# Altium PCB bbb.PcbDoc
Units mil, origin at the board's own origin, x right, y up, seen from the top; angles counter-clockwise.
Board outline 1950 x 1950 mil, 2 copper layers (Top Layer, Bottom Layer); 50 components, 40 nets, 176 pads, 13 vias.
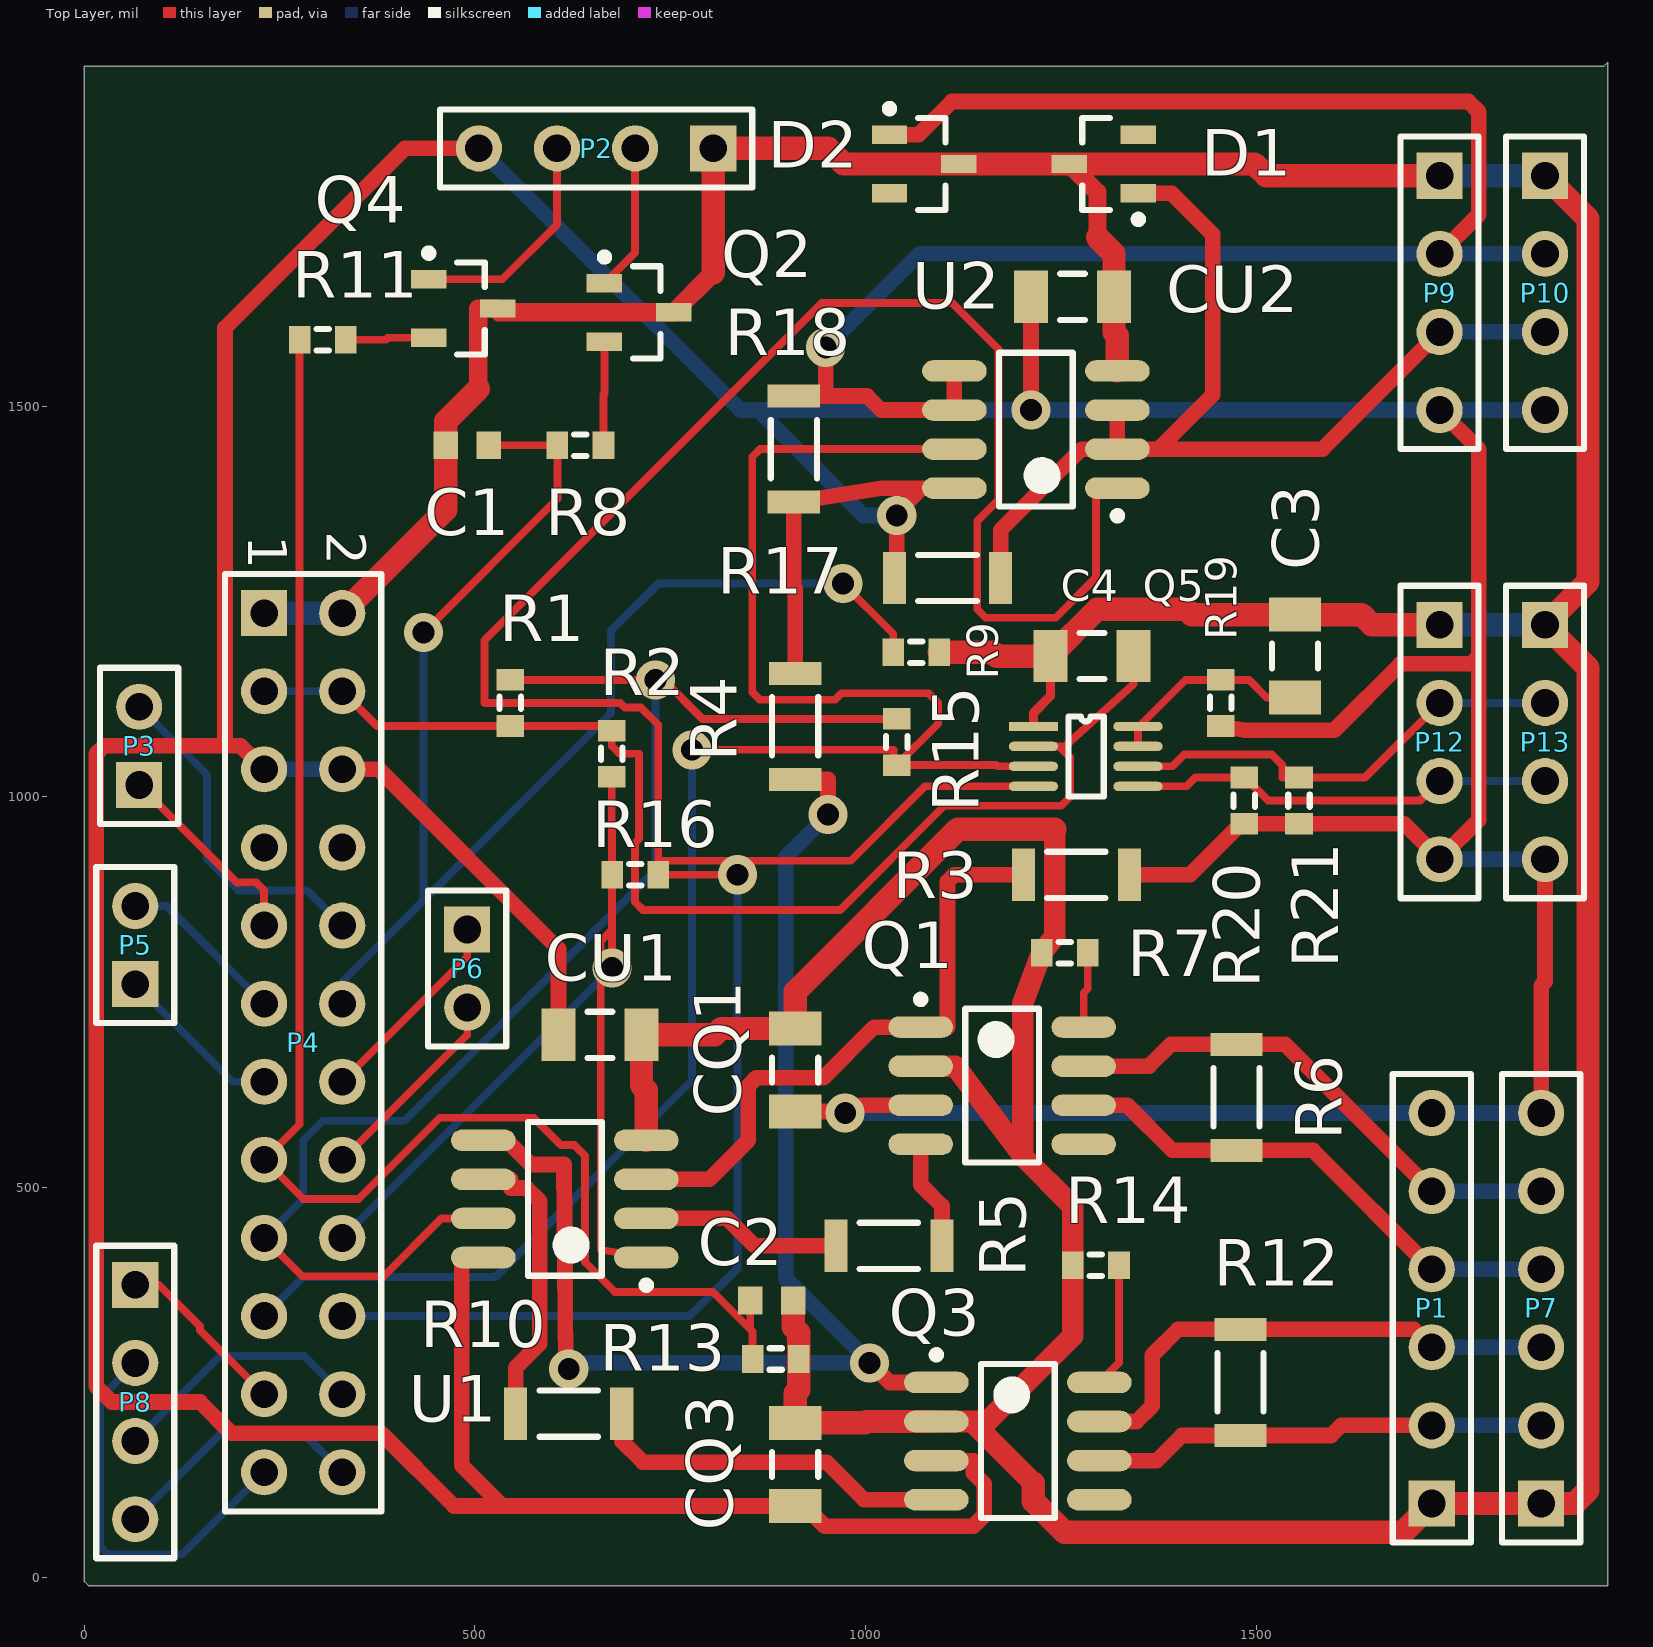
[diagram p0: Top Layer view]
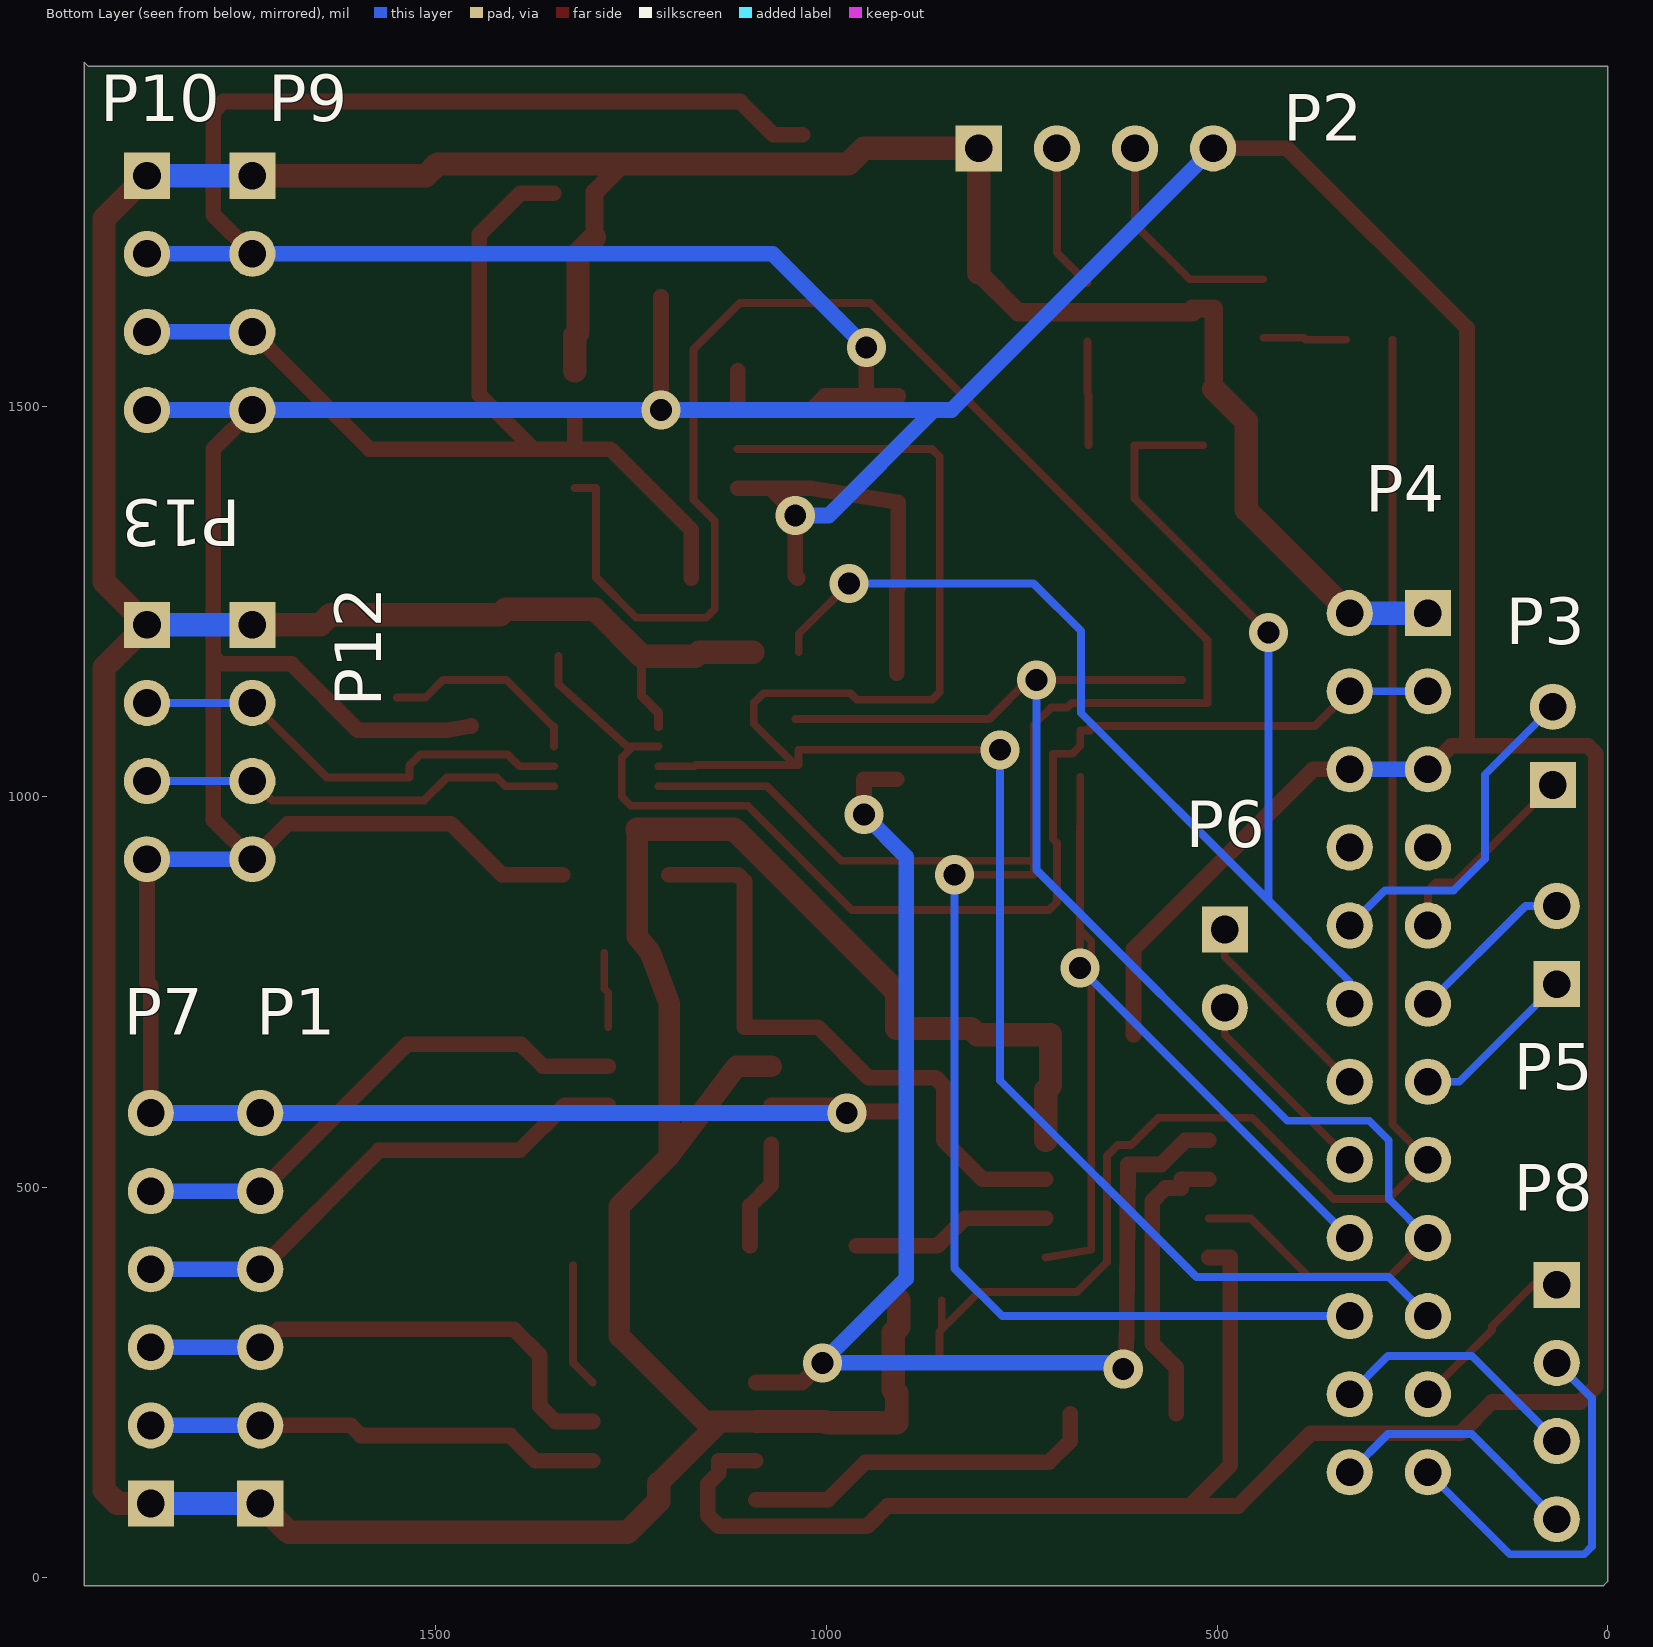
[diagram p1: Bottom Layer view, seen from below]

## Layer stack, top to bottom
Top Solder: solder mask 0.4, Solder Resist, Dk 3.5
Top Layer: signal copper 1.4
Dielectric 1: dielectric 12.6, FR-4, Dk 4.8
Bottom Layer: signal copper 1.4
Bottom Solder: solder mask 0.4, Solder Resist, Dk 3.5

## Board outline
5,-10 0,-5 0,1935 1945,1935 1950,1940 1950,-10

## Design rules (kind name [scope] priority, off if disabled: settings)
Clearance [All] p1: gap=10
MinimumSolderMaskSliver MinimumSolderMaskSliver_1 [HasFootprint('DCT')] p1: minsoldermaskwidth=5
MinimumSolderMaskSliver [All] p2: minsoldermaskwidth=10
PolygonConnect [All] p1: connectstyle=Relief reliefconductorwidth=10 reliefentries=4 polygonreliefangle="90 Angle" airgapwidth=10
RoutingVias [All] p1: holewidth=28 width=50 viastyle="Through Hole" minholewidth=28 minwidth=50 maxholewidth=28 maxwidth=50
SilkToSolderMaskClearance SilkToSolderMaskClearance_2 [IsPad vs HasFootprint('J1-0603')] p1: minsilkscreentomaskgap=2 clearancetoexposedcopper=TRUE
SilkToSolderMaskClearance SilkToSolderMaskClearance_1 [IsPad vs HasFootprint('DCT')] p2: minsilkscreentomaskgap=5 clearancetoexposedcopper=TRUE
SilkToSolderMaskClearance [IsPad] p3: minsilkscreentomaskgap=10 clearancetoexposedcopper=TRUE
SolderMaskExpansion [All] p1: expansion=4
Width Width_3 [InNet('GND')] p1: maxlimit=50 minlimit=10 preferedwidth=30 minimp=50.000000 maximp=50.000000 favimp=50.000000
Width Width_2 [InNet('5V')] p2: maxlimit=30 minlimit=10 preferedwidth=20 minimp=50.000000 maximp=50.000000 favimp=50.000000
Width Width_1 [InNetClass('hc')] p3: maxlimit=30 minlimit=10 preferedwidth=20 minimp=50.000000 maximp=50.000000 favimp=50.000000
Width [All] p4: maxlimit=10 minlimit=10 preferedwidth=10
28 further rules are at their usual default settings.

## Classes and differential pairs
net class hc: 5V NetD1_1 NetD2_1 NetP1_2 NetP1_3 NetP1_4 NetP1_5 NetQ1_1 NetQ1_4 NetQ3_1 NetQ3_4 NetR5_2 NetR10_2

## Components (designator, comment, footprint, x,y, rotation, side; value= is the part's Value field where it differs from the comment)
C1 "Cap Semi" 1608[0603] 490,1450 r180 top
C2 "Cap Semi" 1608[0603] 880,355 r0 top
C3 "Cap Semi" C1206 1550,1180 r90 top
C4 "Cap Semi" C1206 1290,1180 r0 top
CQ1 "Cap Semi" C1206 910,650 r270 top
CQ3 "Cap Semi" C1206 910,145 r270 top
CU1 "Cap Semi" C1206 660,695 r180 top
CU2 "Cap Semi" C1206 1265,1640 r180 top
D1 "BAT54A" SOT-23_N 1305,1810 r180 top
D2 "BAT54A" SOT-23_N 1075,1810 r0 top
P1 "Header 6" HDR1X6 1725,95 r90 top
P2 "Header 4" HDR1X4 805,1830 r180 top
P3 "Header 2" HDR1X2 70,1015 r90 top
P4 "Header 12X2" HDR2X12 230,1235 r270 top
P5 "Header 2" HDR1X2 65,760 r90 top
P6 "Header 2" HDR1X2 490,830 r270 top
P7 "Header 6" HDR1X6 1865,95 r90 top
P8 "Header 4" HDR1X4 65,375 r270 top
P9 "Header 4" HDR1X4 1735,1795 r270 top
P10 "Header 4" HDR1X4 1870,1795 r270 top
P12 "Header 4" HDR1X4 1735,1220 r270 top
P13 "Header 4" HDR1X4 1870,1220 r270 top
Q1 "PCA82C251" SOIC150-8_M 1175,630 r0 top
Q2 "QNPN" SOT-23B_N 710,1620 r0 top
Q3 "PCA82C251" SOIC150-8_M 1195,175 r0 top
Q4 "QNPN" SOT-23B_N 485,1625 r0 top
Q5 "PCA9306DCTR" DCT 1215,1090 r0 top
R1 "Res3" J1-0603 545,1120 r270 top
R2 "Res3" J1-0603 675,1055 r90 top
R3 "270" R1206 1270,900 r0 top
R4 "270" R1206 910,1090 r90 top
R5 "60" R1206 1030,425 r180 top
R6 "120" R1206 1475,615 r90 top
R7 "Res3" J1-0603 1255,800 r180 top
R8 "Res3" J1-0603 635,1450 r0 top
R9 "Res3" J1-0603 1065,1185 r180 top
R10 "60" R1206 620,210 r180 top
R11 "Res3" J1-0603 305,1585 r0 top
R12 "120" R1206 1480,250 r90 top
R13 "Res3" J1-0603 885,280 r180 top
R14 "Res3" J1-0603 1295,400 r180 top
R15 "Res3" J1-0603 1040,1070 r270 top
R16 "Res3" J1-0603 705,900 r0 top
R17 "330" R1206 1105,1280 r180 top
R18 "330" R1206 908.15,1445 r270 top
R19 "Res3" J1-0603 1455,1120 r90 top
R20 "Res3" J1-0603 1485,995 r270 top
R21 "Res3" J1-0603 1555,995 r270 top
U1 "PCA9600D" SOIC150-8_M 615,485 r180 top
U2 "PCA9600D" SOIC150-8_M 1218.15,1470 r180 top

## Footprints (in the part's own frame and the unit in brackets; to place one, negate y for a bottom-side part, rotate by r counter-clockwise, add the part's x,y. Pads: shape width x height; smd on the part's side, far side on the other; paste and mask are expansions set on the pad)
1608[0603] [mm] "Chip Capacitor, Body 1.6x0.8mm, IPC High Density"
  rect 0.8x0.9 smd: 1(-0.7,0) 2(0.7,0)
  body extent -0.87,-0.48 0.87,0.48, height 1.3
C1206 [mm] "Chip Capacitor, Body 3.2x1.6mm, IPC High Density"
  rect 1.1x1.7 smd: 1(-1.35,0) 2(1.35,0)
  silkscreen extent -0.4,-0.75 0.4,0.75, body extent -1.7,-0.9 1.7,0.9, height 1.3
DCT [mm]
  rect 1.6x0.3 smd: 1(0,0)
  oval 1.6x0.3 smd: 2(0,-0.65) 3(0,-1.3) 4(0,-1.95) 5(3.4,-1.95) 6(3.4,-1.3) 7(3.4,-0.65) 8(3.4,0)
  silkscreen extent 1.14,-2.28 2.29,0.33
HDR1X2 [mm] "Connector; Header; 2 Position"
  rect 1.5x1.5 hole 0.9: 1(0,0)
  round 1.5 hole 0.9: 2(2.54,0)
  silkscreen extent -1.27,-1.27 3.81,1.27
HDR1X4 [mm] "Connector; Header; 4 Position"
  rect 1.5x1.5 hole 0.9: 1(0,0)
  round 1.5 hole 0.9: 2(2.54,0) 3(5.08,0) 4(7.62,0)
  silkscreen extent -1.27,-1.27 8.89,1.27
HDR1X6 [mm] "Connector; Header; 6 Position"
  rect 1.5x1.5 hole 0.9: 1(0,0)
  round 1.5 hole 0.9: 2(2.54,0) 3(5.08,0) 4(7.62,0) 5(10.16,0) 6(12.7,0)
  silkscreen extent -1.27,-1.27 13.97,1.27
HDR2X12 [mm] "Connector; Header; 12x2 Position"
  rect 1.5x1.5 hole 0.9: 1(0,0)
  round 1.5 hole 0.9: 2(0,2.54) 3(2.54,0) 4(2.54,2.54) 5(5.08,0) 6(5.08,2.54) 7(7.62,0) 8(7.62,2.54) 9(10.16,0) 10(10.16,2.54) 11(12.7,0) 12(12.7,2.54) 13(15.24,0) 14(15.24,2.54) 15(17.78,0) 16(17.78,2.54) 17(20.32,0) 18(20.32,2.54) 19(22.86,0) 20(22.86,2.54) 21(25.4,0) 22(25.4,2.54) 23(27.94,0) 24(27.94,2.54)
  silkscreen extent -1.27,-1.27 29.21,3.81
J1-0603 [mm] "Chip Resistor, Body 1.6x0.8mm, IPC High Density"
  rect 0.7x0.9 smd: 1(-0.75,0) 2(0.75,0)
  silkscreen extent -0.2,-0.35 0.2,0.35, body extent -0.85,-0.48 0.85,0.48, height 0.9
R1206 [mm] "Chip Resistor, 2-Leads, Body 3.20x1.60mm, IPC Medium Density"
  rect 0.75x1.7 smd: 1(-1.725,0) 2(1.725,0)
  silkscreen extent -0.95,-0.75 0.95,0.75, body extent -1.6,-0.8 1.6,0.8, height 0.6
SOIC150-8_M [mm] "8-Pin Plastic Narrow Body Small Outline Integrated Circuit 1.27 mm Pitch, IPC Low Density"
  oval 2.1x0.7 smd: 1(-2.65,1.905) 2(-2.65,0.635) 3(-2.65,-0.635) 4(-2.65,-1.905) 5(2.65,-1.905) 6(2.65,-0.635) 7(2.65,0.635) 8(2.65,1.905)
  silkscreen extent -2.77,-2.5 1.2,2.93, body extent -2,-2.5 2,2.5, height 1.76
SOT-23_N [mm] "SOT23, 3-Leads, Body 2.9x1.3mm, Pitch 0.95mm, Lead Span 2.5mm, IPC Medium Density"
  rect 1.15x0.6 smd: 1(-1.125,0.95) 2(-1.125,-0.95) 3(1.125,0)
  silkscreen extent -1.25,-1.5 0.7,1.92, body extent -0.7,-1.5 0.7,1.5, height 1.1
SOT-23B_N [mm] "SOT23, 3-Leads, Body 2.9x1.3mm, Pitch 0.95mm, Lead Span 2.4mm, IPC Medium Density"
  rect 1.15x0.6 smd: 1(-1.125,0.95) 2(-1.125,-0.95) 3(1.125,0)
  silkscreen extent -1.25,-1.5 0.7,1.92, body extent -0.7,-1.5 0.7,1.5, height 1.14

## Part data
C1 C2 C3 C4 CQ1 CQ3 CU1 CU2: "Capacitor (Semiconductor SIM Model)"
D1 D2: library part Diode, "Default Diode"
P1 P7: "Header, 6-Pin"
P2 P8 P9 P10 P12 P13: "Header, 4-Pin"
P3 P5 P6: "Header, 2-Pin"
P4: "Header, 12-Pin, Dual row"
Q2 Q4: "NPN Bipolar Transistor"
Q5: library part PCA9306, "PCA9306"
R1 R2 R7 R8 R9 R11 R13 R14 R15 R16 R19 R20 R21: "Resistor"
R3 R4 R5 R6 R10 R12 R17 R18: library part Res3, "Resistor"
U1 U2: library part P82B96

## Via types
v1: diameter 50, hole 28, Top Layer to Bottom Layer, 13 vias

## Nets (pads, with @x,y where several pads share a name; then routed paths per layer and width w, separated by ;. In a path a pad name is that pad's centre, name@x,y a point inside that pad or via, vN(x,y) a via of type N, cw(c..) or ccw(c..) an arc to the next point about the centre after c; other vN are vias at no path point)
3_3V: C4.2 P4.3 P4.4 Q5.2 R1.2 R2.2 | length 1606.3
  Top Layer w10: P4.4 374.53,1090.47 R1.2 662.28,1090.47 662.28,1084.53 R2.2 675,1065 685,1055 710,1055 710,946 705,941 705,865 715,855 967.5,855 1100.97,988.47 1250.47,988.47 1262,1000 1262,1050 1247.59,1064.41 ; Q5.2 1254.87,1064.41 1343.15,1144.41 C4.2
  Bottom Layer w10: P4.3 P4.4
5V: CQ1.2 CQ3.2 CU1.2 CU2.2 P1.6 P2.4 P4.5 P4.6 P7.6 P9.4 P10.4 P12.4 P13.4 Q1.3 Q3.3 R3.2 R4.2 R17.2 R18.2 R19.1 R20.2 R21.2 U1.8 U2.8 | length 9685.6
  Top Layer w20: P4.5 200,1065 180,1065 ; P4.6 376.85,1035 606.85,805 CU1.2 ; P2.4 410,1830 180,1600 180,1065 ; U1.8 483,410 483,143.85 535,91.85 ; CQ1.2 v1@972.15,596.85 ; R4.2 910,1266 908.15,1267.85 R18.2 1019.91,1395 1072.09,1395 ; v1(974,595) v1@972.15,596.85 ; R17.2 1040,1282.91 v1(1040,1360) 1040,1357.09 1037.09,1360 1072.09,1395 ; Q1.3 994.15,605 986,596.85 v1@972.15,596.85 ; Q3.3 1138.01,150 1138.01,134 1152.01,120 1152.01,80 1138.01,66 947.85,66 922,91.85 CQ3.2 535,91.85 ; U2.8 1072.09,1395 ; v1(1211.85,1495) CU2.2 ; R3.2 1415.53,900 1481,965.47 R20.2 R21.2 1689.53,965.47 P12.4 1785,970 1785,1180 ; R19.1 1485.47,1085 1600,1085 1685,1170 1775,1170 1785,1180 ; P9.4 1785,1445 1785,1180 ; P7.6 1865,758 1870,763 P13.4 ; 180,1065 25,1065 15,1055 15,245 35,225 148,225 188,185 380,185 473.15,91.85 535,91.85
  Bottom Layer w20: P4.5 P4.6 ; P2.4 840,1495 865,1495 ; v1(974,595) P1.6 P7.6 ; v1(1040,1360) 997.17,1360 862.17,1495 v1(1211.85,1495) P9.4 P10.4 ; P12.4 P13.4
GND: C1.2 C2.2 C3.2 C4.1 CQ1.1 CQ3.1 CU1.1 CU2.1 D1.3 D2.3 P1.1 P2.1 P4.1 P4.2 P7.1 P9.1 P10.1 P12.1 P13.1 Q1.2 Q2.3 Q3.2 Q4.3 Q5.1 R7.2 R9.1 R13.1 R14.2 U1.4 U2.4 | length 8342.9
  Top Layer w11.81: Q5.1 1215,1107.15 1236.85,1129 C4.1
  Top Layer w23.62: 504,1522 504,1625 Q4.3 531,1625 531,1620 Q2.3 805,1670.71 ; D1.3 1297,1773.71 1297,1716
  Top Layer w27.56: Q1.2 1115,655 1201,540.47 ; Q3.2 1136,200 ; 1215,121 1136,200 ; 1242,958.47 1242,820.47 R7.2 1201,734.53 1201,540.47 ; 1136,200 1156,200 1265.47,309.47 R14.2 1265.47,475.53 1201,540 1201,540.47
  Top Layer w30: P4.2 462.44,1367.44 C1.2 462.44,1480.44 504,1522 ; U1.4 719.33,624 713.15,630.18 CU1.1 807,695 815.15,703.15 CQ1.1 910,750 1118.47,958.47 1242,958.47 ; 805,1670.71 P2.1 952,1830 972,1810 D2.3 D1.3 1498,1810 1513,1795 P9.1 ; C2.2 907.56,320.97 914.53,314 R13.1 914.53,240.53 910,236 CQ3.1 999,198.15 1000.85,200 Q3.2 ; R9.1 1163,1185 1168,1180 C4.1 1296.85,1240 1410.85,1240 1417.7,1233.15 C3.2 1635,1233.15 1648.15,1220 P12.1 ; 1215,121 1215,98 1255,58 1688,58 P1.1 P7.1 1908,95 1925,112 1925,1165 P13.1 1925,1275 1925,1740 P10.1 ; 1297,1716 1318.15,1694.85 CU2.1 1318.15,1594.33 1322.48,1590 U2.4
  Bottom Layer w30: P4.1 P4.2 ; P1.1 P7.1 ; P12.1 P13.1 ; P9.1 P10.1
NetC1_1: C1.1 P4.12 R8.1 R9.2 | length 1798.4
  Top Layer w10: v1(434,1210.06) 605.47,1381.53 R8.1 C1.1 ; v1(971,1273) 1035.47,1208.53 R9.2
  Bottom Layer w10: P4.12 330,763 434,867 ; v1(434,1210.06) 434,867 ; v1(971,1273) 735,1273 674,1212 674,1107 434,867
NetC2_1: C2.1 P4.15 R11.1 R13.2 | length 2023.2
  Top Layer w10: R11.1 275.47,580.47 P4.15 280,485 351,485 455,589 575,589 610,554 627,554 641,540 641,404 679,366 804.47,366 852.44,318.03 ; C2.1 852.44,318.03 ; R13.2 855.47,315 852.44,318.03
NetC3_1: C3.1 Q5.7 Q5.8 R19.2 | length 260.8
  Top Layer w10: Q5.7 Q5.8 1350.47,1090 1410,1149.53 R19.2 1491,1149.53 1513.68,1126.85 C3.1
NetD1_1: D1.1 P9.3 P10.3 R17.1 U2.2 U2.3 | length 1334.1
  Top Layer w20: R17.1 1172.91,1341.22 1276.7,1445 U2.2 ; U2.3 U2.2 ; D1.1 1391.8,1772.6 1444.4,1720 1444.4,1514.4 1375,1445 ; P9.3 1585,1445 1375,1445 ; U2.2 1375,1445
  Bottom Layer w20: P9.3 P10.3
NetD2_1: D2.1 P9.2 P10.2 R18.1 U2.5 U2.6 | length 2275.9
  Top Layer w20: R18.1 949,1512.91 ; v1(949,1575) 949,1512.91 ; D2.1 1068,1847.4 1110.6,1890 1772,1890 1785,1877 1785,1745 P9.2 ; U2.5 U2.6 1019.91,1495 1002,1512.91 949,1512.91
  Bottom Layer w20: v1(949,1575) 1069,1695 P9.2 P10.2
NetP1_2: P1.2 P7.2 Q3.6 R12.1 | length 584.3
  Top Layer w20: Q3.6 1373,150 1405.09,182.09 R12.1 1596,182.09 1608.91,195 P1.2
  Bottom Layer w20: P1.2 P7.2
NetP1_3: P1.3 P7.3 Q3.7 R12.2 | length 662
  Top Layer w20: Q3.7 1347,200 1367,220 1367,284.91 1400,317.91 R12.2 1702.09,317.91 P1.3
  Bottom Layer w20: P1.3 P7.3
NetP1_4: P1.4 P7.4 Q1.6 R6.1 | length 672.7
  Top Layer w20: Q1.6 1335.09,605 1393,547.09 R6.1 1572.91,547.09 P1.4
  Bottom Layer w20: P1.4 P7.4
NetP1_5: P1.5 P7.5 Q1.7 R6.2 | length 675.1
  Top Layer w20: Q1.7 1363,655 1390.91,682.91 R6.2 1537.09,682.91 P1.5
  Bottom Layer w20: P1.5 P7.5
NetP2_2: P2.2 Q2.1 | length 188.9
  Top Layer w10: Q2.1 705,1696.69 P2.2
NetP2_3: P2.3 Q4.1 | length 290.9
  Top Layer w10: Q4.1 535,1662.4 605,1732.4 P2.3
NetP3_1: P3.1 P4.9 | length 260.9
  Top Layer w10: P3.1 195,890 220,890 230,880 P4.9
NetP3_2: P3.2 P4.10 | length 439.2
  Bottom Layer w10: P3.2 157,1028 157,920 197,880 285,880 P4.10
NetP4_11: P4.11 P5.2 | length 216.8
  Bottom Layer w10: P5.2 105,860 P4.11
NetP4_13: P4.13 P5.1 | length 216.8
  Bottom Layer w10: P5.1 190,635 P4.13
NetP4_14: P4.14 P6.1 | length 261.3
  Top Layer w10: P4.14 490,795 P6.1
NetP4_16: P4.16 P6.2 | length 261.3
  Top Layer w10: P4.16 490,695 P6.2
NetP4_19: P4.19 Q5.3 R15.2 U2.7 | length 2469.6
  Top Layer w10: v1(778,1060) 1036,1060 1036,1040.47 R15.2 ; U2.7 865,1445 855,1435 855,1134 865,1124 961,1124 969.28,1132.28 1080.72,1132.28 1093,1120 1093,1093.47 R15.2 ; Q5.3 1169,1038.82 1167.35,1040.47 R15.2
  Bottom Layer w10: P4.19 280,385 526.28,385 778,636.72 v1(778,1060)
NetP4_20: P4.20 Q5.4 R16.2 U2.1 | length 3688.3
  Top Layer w10: v1(836,900) R16.2 734.53,918 ; Q5.4 1076.23,1013.23 981,918 734.53,918 ; U2.1 1295,1395 1295,1280.58 1243.42,1229 1154,1229 1143,1240 1143,1352.84 1170.16,1380 1170.16,1572.84 1111,1632 944,1632 512,1200 512,1120 686,1120 692,1114 712.53,1114 734.53,1092 734.53,918
  Bottom Layer w10: P4.20 775,335 836,396 v1(836,900)
NetP4_21: P4.21 P8.1 | length 225.9
  Top Layer w10: P8.1 95,375 148,322 148,317 P4.21
NetP4_22: P4.22 P8.3 | length 330.4
  Bottom Layer w10: P8.3 174,284 281,284 P4.22
NetP4_23: P4.23 P8.2 | length 511.3
  Bottom Layer w10: P8.2 20,230 20,40 30,30 125,30 P4.23
NetP4_24: P4.24 P8.4 | length 330.4
  Bottom Layer w10: P8.4 174,184 281,184 P4.24
NetP12_2: P12.2 P13.2 Q5.6 R21.1 | length 588.2
  Top Layer w10: Q5.6 1393,1038.82 1408.18,1054 1520,1054 1534,1040 1534,1024.53 R21.1 1639.53,1024.53 P12.2
  Bottom Layer w10: P12.2 P13.2
NetP12_3: P12.3 P13.3 Q5.5 R20.1 | length 548.4
  Top Layer w10: Q5.5 1411,1013.23 1422.3,1024.53 R20.1 1485.94,1024.53 1515.47,995 1710,995 P12.3
  Bottom Layer w10: P12.3 P13.3
NetQ1_1: Q1.1 R3.1 U1.3 | length 794.6
  Top Layer w20: U1.3 800,510 850,560 850,630 860,640 946,640 1011,705 Q1.1 1105,705 1105,891.5 1113.5,900 R3.1
NetQ1_4: Q1.4 R5.1 | length 141.3
  Top Layer w20: Q1.4 1070.67,503.24 1097.91,476 R5.1
NetQ1_8: Q1.8 R7.1 | length 97.2
  Top Layer w10: Q1.8 1279.33,749 1284.53,754.2 R7.1
NetQ2_2: Q2.2 R8.2 | length 133.1
  Top Layer w10: R8.2 664.53,1515 665.71,1516.18 Q2.2
NetQ3_1: Q3.1 R4.1 U1.5 | length 1719.9
  Top Layer w20: U1.5 540.42,560 571.42,529 614,529 616,271 v1(620,267) ; R4.1 952,1022.09 v1(952,977) ; v1(1005,275) 1006,275 1031,250 Q3.1
  Bottom Layer w20: v1(620,267) 628,275 v1(1005,275) 1005,276 898,383 898,923 v1(952,977)
NetQ3_4: Q3.4 R10.1 | length 468.8
  Top Layer w20: R10.1 687.91,175.09 715,148 950,148 998,100 Q3.4
NetQ3_8: Q3.8 R14.1 | length 160.4
  Top Layer w10: Q3.8 1324.53,275.2 R14.1
NetQ4_2: Q4.2 R11.2 | length 107.3
  Top Layer w10: R11.2 386,1585 388.6,1587.6 Q4.2
NetR5_2: R5.2 U1.2 | length 257.3
  Top Layer w20: U1.2 823,460 858,425 R5.2
NetR10_2: R10.2 U1.6 | length 375.2
  Top Layer w20: U1.6 546,510 546,499 566,499 583,482 583,299.91 552.09,269 R10.2
SCL: P4.17 R1.1 R15.1 U1.7 | length 1830.9
  Top Layer w10: P4.17 279,386 383,386 457,460 U1.7 ; R1.1 v1(731,1149.53) 741.34,1149.53 791.34,1099.53 R15.1
  Bottom Layer w10: P4.17 280,485 280,560 305,585 410,585 731,906 v1(731,1149.53)
SDA: P4.18 R2.1 R16.1 U1.1 | length 1208.4
  Top Layer w10: R2.1 675,962.47 675.47,962 R16.1 675.47,829.47 ; v1(675.47,780.47) 675.47,829.47 ; U1.1 661,420 661,815 675.47,829.47
  Bottom Layer w10: P4.18 v1(675.47,780.47)
pads on no net: D1.2 D2.2 P4.7 P4.8 Q1.5 Q3.5

## Silkscreen, mask and mechanical layers (free items; w line width, h text height)
Mechanical 1:
  lines w47.24: -23.62,-5 ccw(c0,-5) -16.7,-21.7 ; -23.62,-5 ccw(c0,-5) -16.7,-21.7 ; -23.62,-5 -23.62,1935 ; -23.62,1935 cw(c0,1935) 0,1958.62 ; -23.62,1935 cw(c0,1935) 0,1958.62 ; -16.7,-21.7 -11.7,-26.7 ; -11.7,-26.7 ccw(c5,-10) 5,-33.62 ; -11.7,-26.7 ccw(c5,-10) 5,-33.62 ; 0,1958.62 1935.47,1958.62 ; 5,-33.62 1950,-33.62 ; 1935.47,1958.62 cw(c1950,1940) 1973.62,1940 ; 1935.47,1958.62 cw(c1950,1940) 1973.62,1940 ; 1950,-33.62 ccw(c1950,-10) 1973.62,-10 ; 1950,-33.62 ccw(c1950,-10) 1973.62,-10 ; 1973.62,-10 1973.62,1940

## Text inside footprints (layer, text, board x,y; h text height)
P4: Top Overlay "1" at 210,1335 h50 r270; Top Overlay "2" at 310,1340 h50 r270